# EAGLE board F7&UI&keyholder (EAGLE 9.4.0)
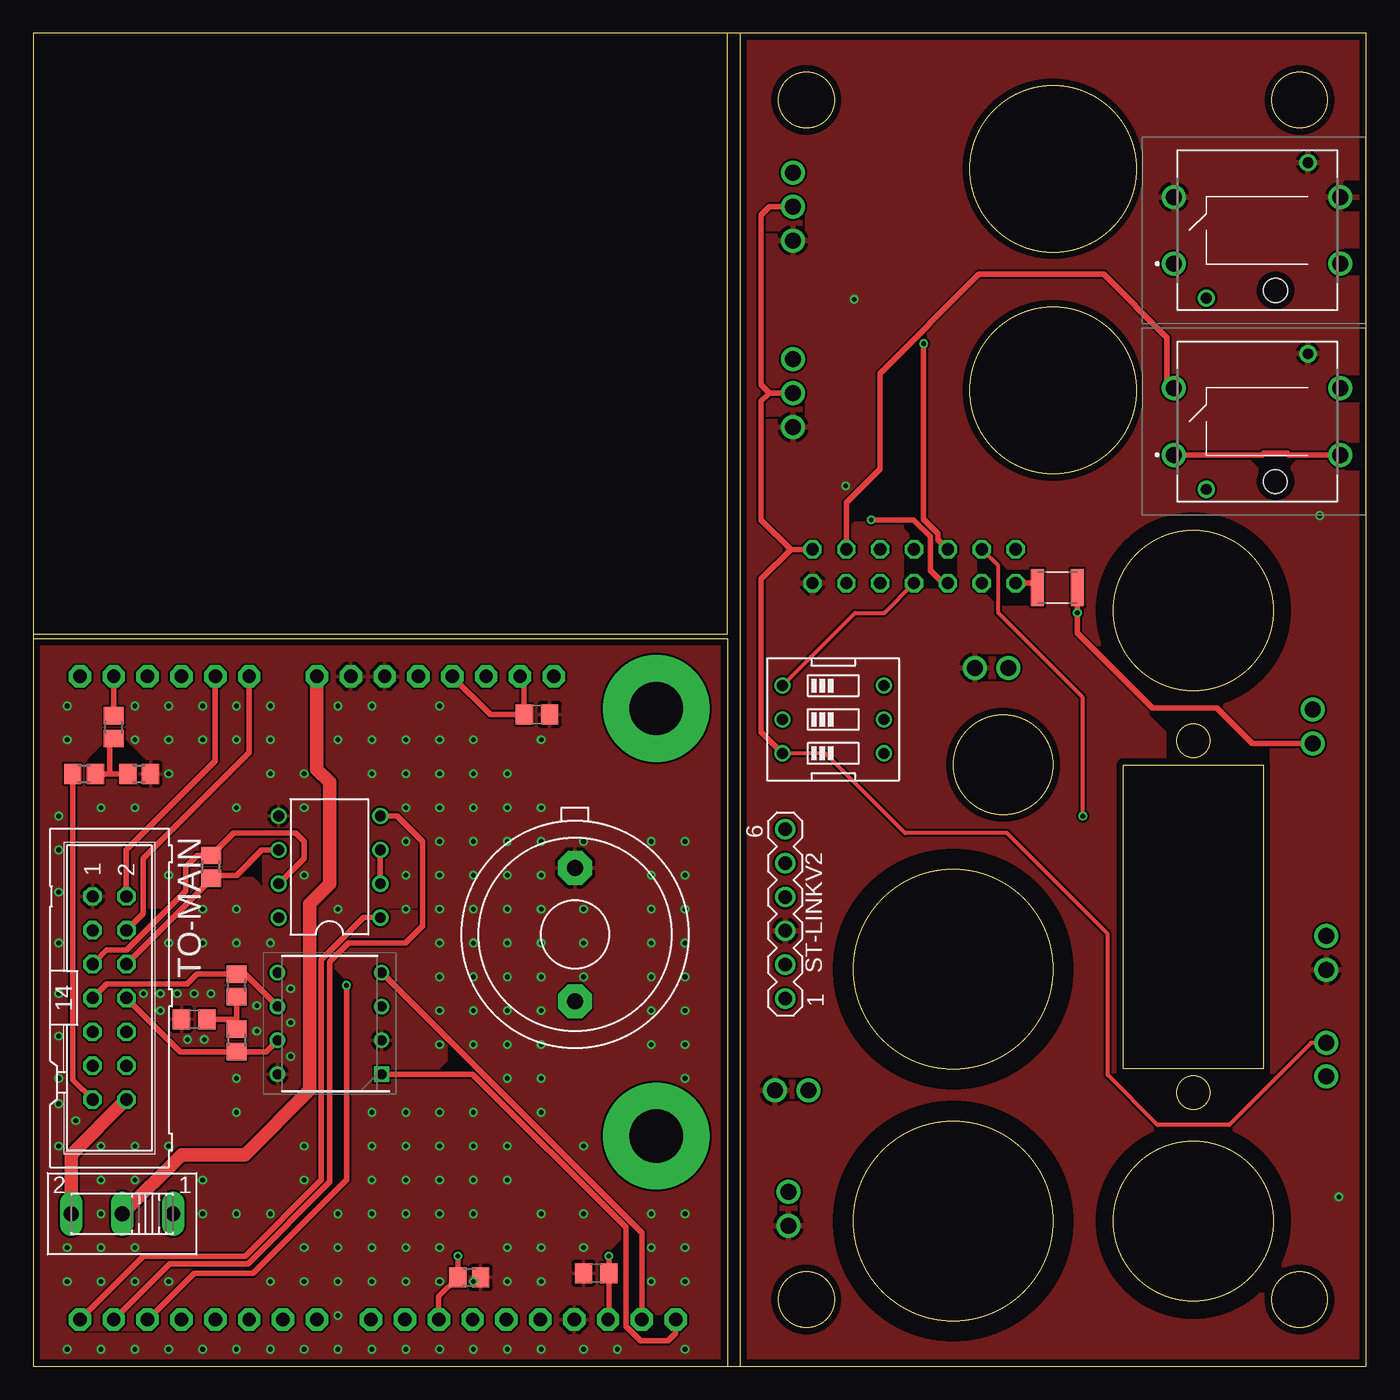
[diagram p0: board, top side]
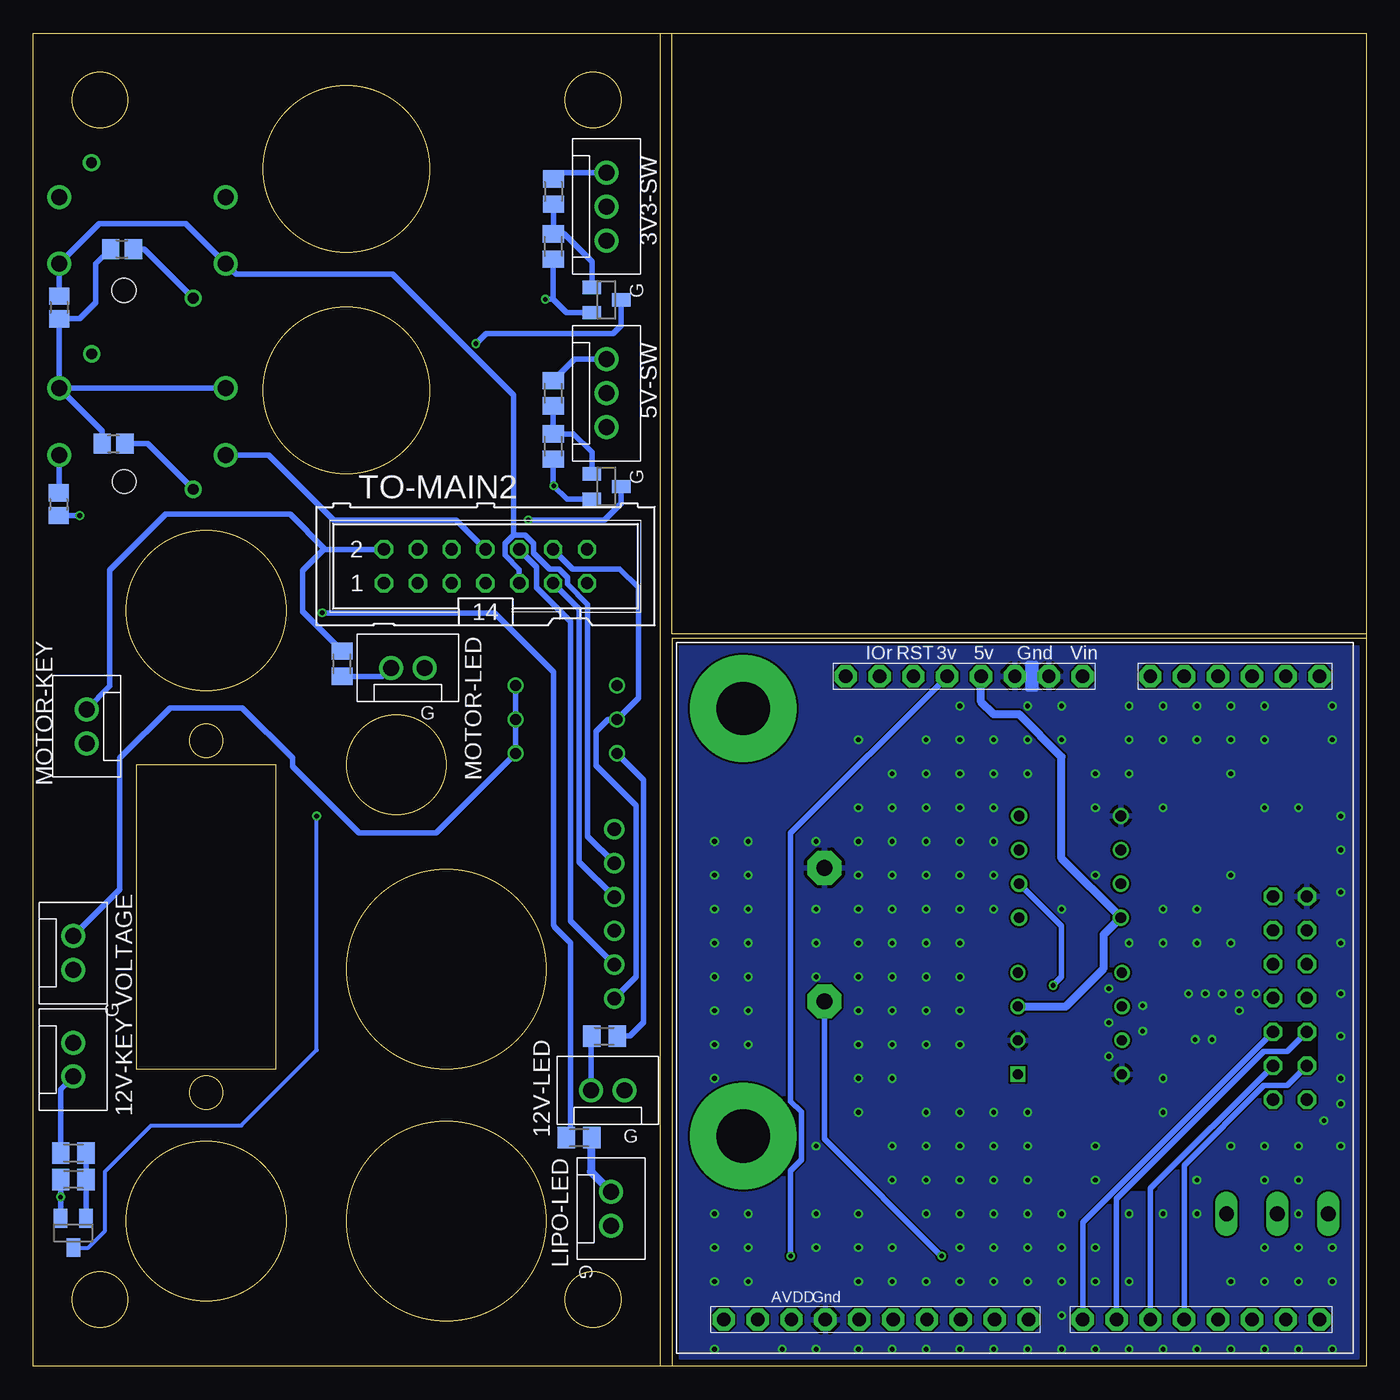
[diagram p1: board, bottom side, seen from below]

Size 100 x 100 mm. Coordinates in mm from the lower left corner, seen from the top.
Outline: 52.07,0 0,0 0,54.61
Outline: 52.07,100 100,100 100,0 53,0
Outline: 52.07,100 0,100 0,54.93
Outline: 0,54.93 0,54.61
Outline: 53,100 53,0
Outline: 52,0 52.07,0
Outline: 52.07,0 53,0
Outline: 0,54.93 52.07,54.93 52.07,100
Outline: 0,54.61 52.07,54.61 52.07,0
Outline: 81.78,22.32 81.78,45.12 92.28,45.12 92.28,22.32 81.78,22.32
Outline: circle at 69.01,10.89 radius 7.5
Outline: circle at 87.03,10.89 radius 6
Outline: circle at 69.01,29.78 radius 7.5
Outline: circle at 76.5,73.21 radius 6.25
Outline: circle at 76.5,89.84 radius 6.25
Outline: circle at 87.03,20.52 radius 1.25
Outline: circle at 87.03,46.92 radius 1.25
Outline: circle at 72.76,45.12 radius 3.75
Outline: circle at 87.03,56.7 radius 6
Outline: circle at 58,5 radius 2.1
Outline: circle at 95,5 radius 2.1
Outline: circle at 58,95 radius 2.1
Outline: circle at 95,95 radius 2.1
Copper layers (1*16): Top 0.035mm / dielectric 1.6mm / Bottom 0.035mm
Design rules "Elecrow_2-layer_PCB_eagle_rule": minimum track width 6mil, minimum drill 12mil, track to track 6mil, track to pad 6mil, pad to pad 6mil, via to via 8mil, smd to smd 0mil, copper to edge 20mil, drill to drill 10mil, minimum pad ring 6mil, minimum via ring 6mil, stop-mask expansion 0mil, vias tented up to drill 100mil, thermal gap 10mil
tRestrict: area 60,1.9 to 78,19.9; area 79.7,3.6 to 94.3,18.2; area 60,20.8 to 78,38.8; area 79.7,49.4 to 94.3,64; 57 lines
bRestrict: 5 lines

## Footprints (pad centres in the part's own frame; a part is rotated, then mirrored left to right if it is on the bottom)
SOT23 = smd 1 x 1.4: 1 -0.95,-1.1; 2 0.95,-1.1; 3 0,1.1
CON3 = drill 1.2: P$1 -2.54,0; P$2 0,0; P$3 2.54,0
CON2 = drill 1.2: P$1 -1.27,0; P$2 1.27,0
R0805 = smd 1.3 x 1.5: 1 -0.85,0; 2 0.85,0
C0805 = smd 1.3 x 1.5: 1 -0.95,0; 2 0.95,0
DIL08 = drill 0.813: 1 -3.81,-3.81; 2 -1.27,-3.81; 3 1.27,-3.81; 4 3.81,-3.81; 5 3.81,3.81; 6 1.27,3.81; 7 -1.27,3.81; 8 -3.81,3.81
DIP781W56P254L950H533Q8N = drill 0.759 pad 1.159 square: 1 -3.905,3.81 | drill 0.759 pad 1.159: 2 -3.905,1.27; 3 -3.905,-1.27; 4 -3.905,-3.81; 5 3.905,-3.81; 6 3.905,-1.27; 7 3.905,1.27; 8 3.905,3.81
M0805 = smd 1.3 x 1.6: 1 -0.95,0; 2 0.95,0
255SB = drill 1.118 long: 1 -3.81,0; 2 0,0; 3 3.81,0
ST12303FCG = drill 1.2 pad 1.8: 1 -6.25,-2.5; 2 6.25,-2.5; 3 -6.25,2.5; 4 6.25,2.5 | drill 0.8 pad 1.3: ANODE -3.81,-5.08; CATHODE 3.81,5.08 | hole 1.8: 1.37,-4.5
F/EE17P = drill 1.194 pad 2.54 octagon: 1 -5.004,0; 2 5.004,0
MA06-1 = drill 1.016: 1 -6.35,0; 2 -3.81,0; 3 -1.27,0; 4 1.27,0; 5 3.81,0; 6 6.35,0
EDG-03 = drill 0.813: 1 -2.54,-3.81; 2 0,-3.81; 3 2.54,-3.81; 4 2.54,3.81; 5 0,3.81; 6 -2.54,3.81
ML14 = drill 0.914 octagon: 1 -7.62,-1.27; 2 -7.62,1.27; 3 -5.08,-1.27; 4 -5.08,1.27; 5 -2.54,-1.27; 6 -2.54,1.27; 7 0,-1.27; 8 0,1.27; 9 2.54,-1.27; 10 2.54,1.27; 11 5.08,-1.27; 12 5.08,1.27; 13 7.62,-1.27; 14 7.62,1.27
F7-DISCO-ARDUINO = drill 1 pad 1.676 octagon: 3V 20.32,50.8; 5V 22.86,50.8; AVDD 8.636,2.54; GND1 11.176,2.54; GND@1 27.94,50.8; GND@2 25.4,50.8; IOREF 15.24,50.8; PA4 38.1,50.8; PA6 35.56,50.8; PA11 21.336,2.54; PA12 13.716,2.54; PB8 3.556,2.54; PB9 6.096,2.54; PB14 16.256,2.54; PB15 18.796,2.54; PC2 40.64,50.8; PC6 45.72,2.54; PC7 48.26,2.54; PC8 35.56,2.54; PF6 40.64,2.54; PF7 33.02,2.54; PF8 45.72,50.8; PF9 48.26,50.8; PF10 43.18,50.8; PH6 23.876,2.54; PJ0 38.1,2.54; PJ1 43.18,2.54; PJ3 30.48,2.54; PJ4 26.416,2.54; RESERVED 12.7,50.8; RESET 17.78,50.8; VIN 30.48,50.8
0ZCH = smd 1 x 2.8: 1 -1.5,0; 2 1.5,0

## Placement (x,y rotation side)
3V3-FET  BSS123  [SOT23]  57,80 270 bottom
3V3-SW  XH-3  [CON3]  57,87 270 bottom
5V-FET  BSS123  [SOT23]  57,66 270 bottom
5V-SW  XH-3  [CON3]  57,73 270 bottom
12V-FET  BSS123  [SOT23]  97,10 180 bottom
12V-KEY  XH-2  [CON2]  97,23 270 bottom
12V-LED  XH-2  [CON2]  56.9,20.7 0 bottom
BAT-JP1  0  [R0805]  6.03,47.94 90 top
BAT-R1  2.2k  [R0805]  3.81,44.45 0 top
BAT-R2  330  [R0805]  7.94,44.45 0 top
BUZ-R1  4.7k  [R0805]  32.7,6.67 0 top
CAN-C1  4.7u  [C0805]  12.06,26.04 0 top
CAN-R1  51  [R0805]  15.24,24.45 270 top
CAN-R2  51  [R0805]  15.24,28.57 90 top
IC2  LTC485N  [DIL08]  22.23,37.47 90 top
IC4  MCP2561-E_P  [DIP781W56P254L950H533Q8N]  22.23,25.72 180 top
LED-R1  ?  [M0805]  59.05,17.14 0 bottom
LED-R2  ?  [M0805]  76.83,52.7 270 bottom
LED-R3  ?  [M0805]  57.15,24.77 180 bottom
LIPO-LED  XH-2  [CON2]  56.66,11.81 270 bottom
MOTOR-KEY  XH-2  [CON2]  96,48 90 bottom
MOTOR-LED  XH-2  [CON2]  71.9,52.4 0 bottom
R1  4.7k  [M0805]  97,14 0 bottom
R2  1k  [M0805]  60.97,88.13 90 bottom
R3  4.7k  [M0805]  61,69 90 bottom
R4  4.7k  [M0805]  61,84 90 bottom
R5  1k  [M0805]  61,73 90 bottom
R6  1k  [M0805]  97,16 180 bottom
RS485-S  100  [R0805]  13.34,37.47 90 top
S1  [255SB]  6.67,11.43 180 top
S3  ST12-303FCG  [ST12303FCG]  91.81,70.88 0 top
S4  ST12-303FCG  [ST12303FCG]  91.82,85.22 0 top
SG1  F/EE17P  [F/EE17P]  40.64,32.38 90 top
ST-LINKV2  [MA06-1]  56.41,33.93 90 top
STM-C1  0.1u  [C0805]  37.78,48.9 180 top
STM-C2  0.1u  [C0805]  42.23,6.99 0 top
STM-R1  4.7K  [R0805]  98.06,79.44 270 bottom
STM-R2  4.7K  [R0805]  98.1,64.67 270 bottom
SW1  [EDG-03]  60.02,48.52 270 top
SW-R1  330  [R0805]  93.34,83.82 0 bottom
SW-R2  330  [R0805]  93.98,69.22 0 bottom
TO-MAIN  [ML14]  5.71,27.62 270 top
TO-MAIN2  [ML14]  66.08,60.02 0 bottom
U$1  F7-DISCO-ARDUINO  [F7-DISCO-ARDUINO]  51.75,0.95 0 bottom
USB-POLY  100mA  [0ZCH]  76.83,58.42 180 top
VOLTAGE  XH-2  [CON2]  97,31 270 bottom

## Library data of the parts
3V3-FET 5V-FET 12V-FET = transistor-small-signal
3V3-SW 5V-SW 12V-KEY 12V-LED BAT-JP1 BAT-R1 BAT-R2 BUZ-R1 CAN-R1 CAN-R2 LIPO-LED MOTOR-KEY MOTOR-LED RS485-S STM-R1 STM-R2 SW-R1 SW-R2 VOLTAGE = 0@Mylibrary-main1
CAN-C1 STM-C1 STM-C2 = rcl
IC2 = 0linear-technology; OC_FARNELL: unknown; OC_NEWARK: unknown
IC4 = MCP2561-E_P; ALLIED_NUMBER: 70415102; ALLIED_PRICE-STOCK: https://www.alliedelec.com/microchip-technology-inc-mcp2561-e-p/70415102/; DESCRIPTION: CAN Transceiver 1Mbps 5V 125degC PDIP8 Microchip MCP2561-E/P, CAN Transceiver 1-channel IEC 61000-4-2, 8-Pin PDIP; HEIGHT: 5.334mm; MANUFACTURER_NAME: Microchip; MANUFACTURER_PART_NUMBER: MCP2561-E/P; MOUSER_PART_NUMBER: 579-MCP2561-E/P; MOUSER_PRICE-STOCK: https://www.mouser.com/Search/Refine.aspx?Keyword=579-MCP2561-E%2FP; RS_PART_NUMBER: 1652124; RS_PRICE-STOCK: http://uk.rs-online.com/web/p/products/1652124
LED-R1-LED-R3 R1-R6 = resistor
S1 = 0switch
S3 S4 = ST12-303FCG; DESCRIPTION: Pushbutton Switch; HEIGHT: 8mm; MANUFACTURER_NAME: Switronic; MANUFACTURER_PART_NUMBER: ST12-303FCG
SG1 = buzzer; OC_FARNELL: unknown; OC_NEWARK: unknown
ST-LINKV2 = 0con-lstb; OC_FARNELL: unknown; OC_NEWARK: unknown
SW1 = 0special
TO-MAIN TO-MAIN2 = 0con-harting-ml; OC_FARNELL: unknown; OC_NEWARK: unknown
U$1 = F7-DISCO
USB-POLY = bel-fuse

## Nets
3V3-SW: 3V3-FET.3 TO-MAIN2.6
5V-SW: 5V-FET.3 TO-MAIN2.5
12V-SW: 12V-FET.3 TO-MAIN2.4
+3V3S: S3.3 S3.4 ST-LINKV2.1 STM-R1.2 SW1.2 SW-R1.1 SW-R2.1 TO-MAIN2.12
+5V: IC2.8 IC4.3 U$1.5V
+5VS: SW1.1 TO-MAIN2.7
+9V: S1.2 U$1.VIN
+12V: S1.3 TO-MAIN.14
+12VS: TO-MAIN2.3
BOOT0: S3.1 S3.2 STM-R2.1 TO-MAIN2.8
BUZZER1: BUZ-R1.1 SG1.1 U$1.PA11
CAN1-RX: IC4.1 U$1.PB8
CAN1-TX: IC4.4 U$1.PB9
CAN-H: CAN-R1.2 IC4.7 TO-MAIN.8
CAN-L: CAN-R2.2 IC4.6 TO-MAIN.7
EMERGENCY: TO-MAIN.2 U$1.PA4
F7-F4-SIG1: TO-MAIN.12 U$1.PC8
F7-F4-SIG2: TO-MAIN.11 U$1.PJ0
F7-RS-SIG1: TO-MAIN.10 U$1.PJ3
F7-RS-SIG2: TO-MAIN.9 U$1.PF7
GND: BAT-R2.2 BUZ-R1.2 CAN-C1.1 IC2.5 IC4.2 IC4.8 SG1.2 STM-C1.1 STM-C2.1 TO-MAIN.1 U$1.GND1 U$1.GND@1 U$1.GND@2
GND2: 3V3-FET.2 3V3-SW.P$3 5V-FET.2 5V-SW.P$3 12V-FET.2 12V-LED.P$2 LIPO-LED.P$2 MOTOR-LED.P$2 R1.1 R3.1 R4.1 S3.CATHODE S4.3 S4.4 S4.CATHODE ST-LINKV2.3 STM-R2.2 TO-MAIN2.13 VOLTAGE.P$2
HUMAN1: TO-MAIN.4 U$1.PA6
LIPO: BAT-R1.1 TO-MAIN.13
LIPO2: LED-R1.1 MOTOR-KEY.P$1 USB-POLY.1
LIPO-ADC: BAT-JP1.2 U$1.PF8
MOTOR-FET: LED-R2.1 MOTOR-KEY.P$2 TO-MAIN2.2
N$2: 3V3-FET.1 R2.1 R4.2
N$3: 5V-FET.1 R3.2 R5.1
N$4: CAN-C1.2 CAN-R1.1 CAN-R2.1
N$6: SW1.4 SW1.5 SW1.6 VOLTAGE.P$1
N$7: 12V-FET.1 R1.2 R6.1
N$8: 12V-KEY.P$2 R6.2
N$9: 3V3-SW.P$1 R2.2
N$10: 5V-SW.P$1 R5.2
N$11: S4.ANODE SW-R1.2
N$12: S3.ANODE SW-R2.2
N$13: TO-MAIN2.1 USB-POLY.2
N$14: LED-R1.2 LIPO-LED.P$1
N$15: LED-R2.2 MOTOR-LED.P$1
N$16: 12V-LED.P$1 LED-R3.2
N$36: BAT-JP1.1 BAT-R1.2 BAT-R2.1
NRST: S4.1 S4.2 ST-LINKV2.5 STM-R1.1 TO-MAIN2.9
RS-CHA: IC2.6 RS485-S.1 TO-MAIN.6
RS-CHB: IC2.7 RS485-S.2 TO-MAIN.5
RS-SIG: IC2.2 IC2.3 U$1.PJ1
SWCLK: ST-LINKV2.2 TO-MAIN2.10
SWDIO: ST-LINKV2.4 TO-MAIN2.11
USART6-RX: IC2.1 U$1.PC7
USART6-TX: IC2.4 U$1.PC6
VCC: STM-C1.2 STM-C2.2 U$1.3V U$1.AVDD U$1.IOREF
VDD: 3V3-SW.P$2 5V-SW.P$2 12V-KEY.P$1 LED-R3.1 SW1.3 TO-MAIN2.14

## Tracks (layer width: path | path; a pad name or v marks a point on that pad's centre or on a via)
3V3-SW  (via drill 0.35)
  Top 0.406: TO-MAIN2.6 67.87,62.04 67.87,62.46 66.79,63.54 v66.79,76.72
  Bottom 0.406: 3V3-FET.3 55.9,78.08 56.52,77.47 66.04,77.47 v66.79,76.72
5V-SW  (via drill 0.35)
  Top 0.406: v62.87,63.5 66.04,63.5 67.31,62.23 67.31,59.69 68.25,58.74 TO-MAIN2.5
  Bottom 0.406: 5V-FET.3 55.9,64.79 55.88,64.77 57.15,63.5 v62.87,63.5
12V-SW  (via drill 0.35)
  Top 0.305: v78.74,41.27 78.74,50.16 72.39,56.52 72.39,60.05 TO-MAIN2.4
  Bottom 0.305: 12V-FET.3 95.88,8.9 94.61,10.16 94.61,14.61 91.16,18.06 84.39,18.06 78.74,23.71 v78.74,41.27
+3V3S
  Top 0.406: TO-MAIN2.12 61,64.81 63.5,67.31 63.5,74.47 70.95,81.92 80.3,81.92 85.05,77.17 85.05,73.89 S3.3
  Bottom 0.406: ST-LINKV2.1 54.78,29.21 54.78,42.08 57.78,45.09 57.78,47.62 56.89,48.52 SW1.2 54.61,50.12 54.61,58.42 56,59.81 59.53,59.81 TO-MAIN2.12 | SW-R1.1 95.31,82.7 95.31,79.8 96.52,78.59 STM-R1.2 S3.4 | S3.3 S3.4 | S3.4 94.83,70.14 SW-R2.1
+5V
  Bottom 0.61: IC4.3 22.54,26.99 19.68,29.84 19.68,32.38 IC2.8 22.86,38.1 22.86,45.72 26.04,48.9 27.94,48.9 28.89,49.85 U$1.5V
+5VS
  Top 0.305: SW1.1 61.66,56.52 63.85,56.52 TO-MAIN2.7
+9V
  Top 1.016: S1.2 11.11,15.88 15.88,15.88 20.73,20.73 20.73,34.7 22.23,36.2 22.23,43.81 21.27,44.77 U$1.VIN
+12V
  Top 1.016: TO-MAIN.14 2.86,15.88 S1.3
BOOT0
  Top 0.406: S3.1 92.19,68.38 92.31,68.49 94.06,68.49 94.18,68.38 S3.2
  Bottom 0.406: STM-R2.1 98.06,65.55 S3.2 | TO-MAIN2.8 68.3,63.5 77.47,63.5 82.34,68.38 S3.1
BUZZER1  (via drill 0.35)
  Top 0.406: U$1.PA11 30.42,5.23 BUZ-R1.1 v31.85,8.26
  Bottom 0.406: v31.85,8.26 40.64,17.04 SG1.1
CAN1-RX
  Top 0.406: IC4.1 32.96,21.91 44.45,10.42 44.45,3.01 45.56,1.91 47.62,1.91 48.2,2.48 U$1.PB8
CAN1-TX
  Top 0.406: IC4.4 45.66,10 U$1.PB9
CAN-H
  Top 0.406: TO-MAIN.8 11.01,23.6 CAN-R1.2 17.47,23.6 IC4.7
CAN-L
  Top 0.406: TO-MAIN.7 5.51,28.69 11.54,28.69 12.28,29.43 CAN-R2.2 15.88,29.43 IC4.6
EMERGENCY
  Top 0.406: TO-MAIN.2 6.99,38.73 13.65,45.4 U$1.PA4
F7-F4-SIG1
  Bottom 0.406: TO-MAIN.12 16.19,13.34 U$1.PC8
F7-F4-SIG2
  Bottom 0.406: TO-MAIN.11 5.92,21.07 7.67,21.07 13.65,15.09 U$1.PJ0
F7-RS-SIG1
  Bottom 0.406: TO-MAIN.10 21.27,10.79 U$1.PJ3
F7-RS-SIG2
  Bottom 0.406: TO-MAIN.9 5.92,23.61 7.67,23.61 18.73,12.54 U$1.PF7
GND  (via drill 0.35)
  Bottom 0.406: 25.4,52.7 25.4,50.8 24.77,50.8 24.77,52.7 25.4,52.7 | 25.15,51.18 25.15,52.32 25.02,52.32 25.4,52.7
  other vias: 25.4,16.51 25.4,19.05 27.94,19.05 30.48,19.05 30.48,16.51 27.94,16.51 25.4,13.97 27.94,13.97 30.48,13.97 20.32,6.35 20.32,8.89 25.4,8.89 25.4,11.43 27.94,11.43 30.48,11.43 30.48,8.89 27.94,8.89 25.4,6.35 27.94,6.35 30.48,6.35 33.02,16.51 33.02,19.05 38.1,19.05 35.56,16.51 33.02,13.97 35.56,13.97 41.27,29.21 46.35,29.21 46.35,26.67 46.35,24.13 30.48,26.67 30.48,29.21 33.02,29.21 35.56,29.21 35.56,26.67 33.02,26.67 30.48,24.13 33.02,24.13 35.56,24.13 12.7,13.97 2.54,6.35 2.54,8.89 5.08,8.89 7.62,8.89 7.62,6.35 5.08,6.35 30.48,46.99 30.48,49.53 33.02,46.99 30.48,44.45 33.02,44.45 35.56,44.45 22.86,49.53 25.4,49.53 25.4,46.99 22.86,46.99 20.32,44.45 25.4,44.45 10.16,46.99 10.16,49.53 12.7,49.53 15.24,49.53 15.24,46.99 12.7,46.99 10.16,44.45 2.54,49.53 2.54,46.99 5.08,41.91 10.16,36.83 12.7,34.29 15.24,34.29 10.16,31.75 12.7,31.75 15.24,31.75 30.48,36.83 30.48,39.37 33.02,39.37 35.56,39.37 35.56,36.83 33.02,36.83 30.48,34.29 33.02,34.29 35.56,34.29 38.1,36.83 38.1,39.37 38.1,34.29 41.27,39.37 46.35,39.37 46.35,36.83 41.27,34.29 46.35,34.29 48.9,26.67 48.9,29.21 48.9,24.13 41.27,16.51 38.1,26.67 38.1,29.21 38.1,24.13 35.56,21.59 33.02,11.43 38.1,11.43 38.1,8.89 35.56,8.89 33.02,6.35 35.56,6.35 38.1,6.35 41.27,11.43 46.35,11.43 41.27,1.27 43.81,1.27 33.02,1.27 38.1,1.27 35.56,1.27 25.4,1.27 30.48,1.27 27.94,1.27 22.86,3.81 22.86,8.89 22.86,6.35 17.78,6.35 12.7,1.27 15.24,1.27 17.78,1.27 2.54,1.27 5.08,1.27 7.62,1.27 10.16,6.35 10.16,1.27 20.32,1.27 15.24,19.05 20.32,16.51 20.32,13.97 15.24,11.43 17.78,11.43 12.7,11.43 5.08,11.43 5.08,16.51 10.16,16.51 7.62,16.51 5.08,13.97 7.62,13.97 15.24,21.59 20.32,36.83 22.86,34.29 15.24,41.91 17.78,46.99 17.78,49.53 17.78,44.45 7.62,46.99 7.62,49.53 7.62,41.91 27.94,46.99 27.94,44.45 30.48,41.91 33.02,41.91 35.56,41.91 27.94,36.83 27.94,39.37 27.94,34.29 20.32,41.91 17.78,31.75 41.27,8.89 46.35,8.89 46.35,6.35 48.9,6.35 48.9,8.89 30.48,31.75 33.02,31.75 35.56,31.75 41.27,31.75 46.35,31.75 38.1,31.75 48.9,36.83 48.9,39.37 48.9,34.29 48.9,31.75 38.1,46.99 38.1,41.91 27.94,41.91 22.86,11.43 38.1,21.59 48.9,21.59 48.9,11.43 48.9,1.27 13.34,27.94 10.79,27.94 8.26,27.94 9.53,26.67 12.83,24.51 11.56,24.51 12.06,27.94 9.53,27.94 16.76,27.05 16.76,25.15 19.3,25.78 19.3,23.24 19.3,28.32 1.91,27.94 1.91,31.75 1.91,35.56 1.91,38.73 1.91,41.27 1.91,24.77 1.91,21.59 1.91,19.68 1.91,16.51 3.17,18.41 22.86,1.27
  pour Top: 0,54.61 52.07,54.61 52.07,0 0,0
  pour Bottom: 0,54.61 51.44,54.61 51.44,0 0,0
GND2  (via drill 0.35)
  Bottom 0.406: STM-R2.2 v96.52,63.81 | 3V3-FET.2 60,79.05 61,80.05 | R4.1 61,80.05 | 61,80.05 v61.59,80.05 | 5V-FET.2 59.97,65.05 v60.96,66.04 61,66.08 R3.1 | R1.1 v97.95,12.7 12V-FET.2
  pour Top: 52.96,99.69 100.33,99.69 100.33,0 52.96,0
HUMAN1
  Top 0.406: TO-MAIN.4 8.26,33.97 8.26,38.1 16.19,46.04 U$1.PA6
LIPO
  Top 0.406: TO-MAIN.13 2.96,21.49 BAT-R1.1
LIPO2  (via drill 0.35)
  Top 0.406: USB-POLY.1 v78.33,56.52 78.33,55.02 83.96,49.39 88.79,49.39 91.45,46.73 MOTOR-KEY.P$1
  Bottom 0.406: v78.33,56.52 65.41,56.52 60.96,52.07 60.96,33.16 60.92,33.04 60.88,32.94 59.69,31.75 59.69,17.46 LED-R1.1
LIPO-ADC
  Top 0.406: U$1.PF8 BAT-JP1.2
MOTOR-FET
  Bottom 0.406: 78.11,61.28 78.22,61.28 79.81,59.69 79.81,56.63 LED-R2.1 | 78.11,61.28 TO-MAIN2.2 | MOTOR-KEY.P$2 94.25,51.02 94.25,59.73 90.06,63.91 80.73,63.91 78.11,61.28
N$1  (via drill 4 pad 8)
  other vias: 46.74,17.27
N$2
  Bottom 0.406: R2.1 60.97,84.98 R4.2 60.19,84.95 58.1,82.86 3V3-FET.1
N$3
  Bottom 0.406: R5.1 R3.2 59.47,69.95 58.1,68.58 5V-FET.1
N$4
  Top 0.406: CAN-R1.1 15.24,26.04 | 15.24,26.04 CAN-R2.1 | 15.24,26.04 CAN-C1.2
N$5  (via drill 4 pad 8)
  other vias: 46.74,49.34
N$6
  Bottom 0.406: SW1.6 SW1.5 SW1.4 69.8,40.01 75.56,40.01 80.56,45 80.56,45.63 84.33,49.39 89.74,49.39 93.5,45.63 93.5,35.77 VOLTAGE.P$1
N$7
  Bottom 0.406: R6.1 R1.2 12V-FET.1
N$8
  Bottom 0.406: R6.2 97.95,20.78 12V-KEY.P$2
N$9
  Bottom 0.406: 3V3-SW.P$1 60.51,89.54 R2.2
N$10
  Bottom 0.406: 5V-SW.P$1 59.41,75.54 R5.2
N$11
  Bottom 0.406: S4.ANODE 91.69,83.82 SW-R1.2
N$12
  Bottom 0.406: S3.ANODE 91.42,69.22 SW-R2.2
N$13
  Top 0.406: TO-MAIN2.1 75.01,58.74 USB-POLY.2
N$14
  Bottom 0.406: LED-R1.2 58.17,17.08
  Bottom 0.61: 58.17,17.08 58.17,14.6 LIPO-LED.P$1
N$15
  Bottom 0.406: LED-R2.2 73.81,51.76 MOTOR-LED.P$1
N$16
  Bottom 0.406: LED-R3.2 58.17,24.7 12V-LED.P$1
N$36
  Top 0.406: BAT-R1.2 5.71,44.45 | BAT-R2.1 5.71,44.45 | 5.71,44.45 5.71,46.77 BAT-JP1.1
NRST
  Bottom 0.406: 63.98,62.35 63.1,62.35 62.47,61.73 62.47,61.01 61.28,59.81 60.56,59.81 59.93,59.19 59.93,58.66 58.42,57.15 58.42,39.75 ST-LINKV2.5 | 63.98,62.35 64.61,61.73 64.61,60.84 63.54,59.78 TO-MAIN2.9 | 63.98,62.35 63.98,72.87 73.03,81.92 84.77,81.92 S4.1 88.58,85.72 95.06,85.72 S4.2 STM-R1.1
RS-CHA
  Top 0.406: TO-MAIN.6 13.34,36.51 RS485-S.1 13.55,36.83 15.24,36.83 17.14,38.73 IC2.6
RS-CHB
  Top 0.406: TO-MAIN.5 5.51,31.23 7.02,31.23 11.43,35.64 11.43,37.47 12.28,38.31 RS485-S.2 15.03,40.01 19.68,40.01 20.32,39.37 20.32,38.1 IC2.7
RS-SIG  (via drill 0.35)
  Top 0.406: U$1.PJ1 12.06,6.99 16.51,6.99 23.5,13.97 v23.5,28.57 | IC2.2 IC2.3
  Bottom 0.406: IC2.2 22.86,33.02 22.86,29.21 v23.5,28.57
SWCLK
  Bottom 0.406: ST-LINKV2.2 59.69,33.4 59.69,55.88 62.23,58.42 62.23,59.98 TO-MAIN2.10
SWDIO
  Bottom 0.406: TO-MAIN2.11 60.82,58.56 60.37,58.11 59.05,56.8 59.05,37.84 ST-LINKV2.4
USART6-RX
  Top 0.406: U$1.PC7 8.26,8.26 15.88,8.26 21.59,13.97 21.59,30.48 24.77,33.66 IC2.1
USART6-TX
  Top 0.406: U$1.PC6 10.24,7.7 16.11,7.7 22.23,13.81 22.23,30.32 23.65,31.75 27.94,31.75 29.21,33.02 29.21,39.37 27.3,41.27 IC2.4
VCC  (via drill 0.35)
  Top 0.406: U$1.IOREF 36.83,51.43 STM-C1.2 34.29,48.9 U$1.3V | U$1.AVDD 43.18,3.55 STM-C2.2 v43.18,8.26
  Bottom 0.406: U$1.3V 43.18,40.01 43.18,19.88 42.38,19.08 42.38,15.47 43.18,14.67 v43.18,8.26
VDD
  Top 0.305: 12V-KEY.P$1 95.88,24.27 89.72,18.11 84.35,18.11 80.61,21.84 80.61,32.42 73.03,40.01 65.41,40.01 59.43,45.98 SW1.3
  Top 0.406: 55.24,73 5V-SW.P$2 | 3V3-SW.P$2 55.24,87 54.61,86.36 54.61,73.64 55.24,73 | TO-MAIN2.14 56.83,61.28 | 56.83,61.28 54.61,63.5 54.61,72.39 55.22,73 55.24,73 | SW1.3 54.61,47.58 54.61,59.07 56.83,61.28
  Bottom 0.406: SW1.3 54.22,43.99 54.22,25.79 55.24,24.77 LED-R3.1

## Text on the board
bPlace: G | G | G | G | G | G